# EAGLE board SOT223_UNIVERS4 (EAGLE 6.4)
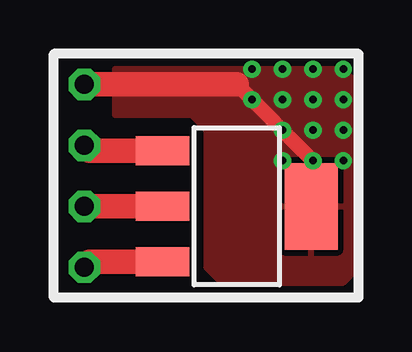
[diagram p0: board, top side]
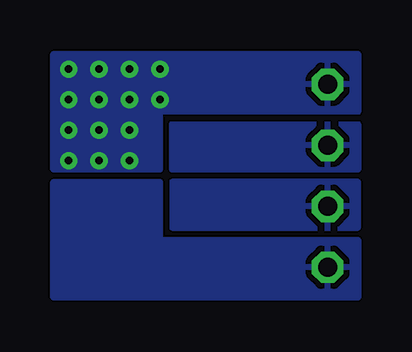
[diagram p1: board, bottom side, seen from below]

No outline drawn. Coordinates in mm, seen from the top.
Copper layers (1*16): Top 0.035mm / dielectric 1.5mm / Bottom 0.035mm
Design rules "default": minimum track width 10mil, minimum drill 0.6mm, track to track 8mil, track to pad 8mil, pad to pad 8mil, via to via 8mil, smd to smd 8mil, copper to edge 40mil, drill to drill 8mil, minimum pad ring 10mil, minimum via ring 8mil, stop-mask expansion 4mil, vias tented up to drill 0mil, thermal gap 10mil
Net classes: 1 pwr: width 0.254 mm

## Footprints (pad centres in the part's own frame; a part is rotated, then mirrored left to right if it is on the bottom)
1 = drill 0.8 octagon: P$1 0,0
SOT223 = smd 1.219 x 2.235: 1 -2.311,-3.099; 2 0,-3.099; 3 2.311,-3.099 | smd 3.6 x 2.2: 4 0,3.099

## Placement (x,y rotation side)
E$58  [1]  1.27,8.89 0 top
E$80  [SOT223]  7.62,3.81 270 top
E$286  [1]  1.27,6.35 0 top
E$287  [1]  1.27,3.81 0 top
E$288  [1]  1.27,1.27 0 top

## Library data of the parts
E$58 E$286-E$288 = drill
E$80 = ref-packages

## Nets
S$87 [pwr]: E$58.P$1 E$80.4
S$122 [pwr]: E$80.1 E$286.P$1
S$123 [pwr]: E$80.2 E$287.P$1
S$124 [pwr]: E$80.3 E$288.P$1

## Tracks (layer width: path | path; a pad name or v marks a point on that pad's centre or on a via)
S$87  (via drill 0.3)
  Top 0.254: 10.79,3.89 E$80.4
  Top 0.61: 7.62,8.89 v10.79,5.71 10.79,3.89
  Top 1.016: E$58.P$1 7.62,8.89
  other vias: 12.06,5.71 9.53,5.71 9.53,6.99 10.79,6.99 12.06,6.99 12.06,8.26 10.79,8.26 9.53,8.26 9.53,9.53 10.79,9.53 12.06,9.53 8.26,8.26 8.26,9.53
  pour Top: 2.54,9.53 2.54,7.62 5.71,7.62 6.35,6.99 6.35,1.27 6.99,0.64 12.06,0.64 12.7,1.27 12.7,8.89 12.06,9.53
  pour Bottom: 0,10.16 0,7.75 8.26,7.75 8.26,5.33 12.7,5.33 12.7,10.16
S$122
  Top 1.016: E$286.P$1 1.5,6.12 E$80.1
  pour Bottom: 0,7.24 0,5.33 7.75,5.33 7.75,7.24
S$123
  Top 1.016: E$287.P$1 E$80.2
  pour Bottom: 0,2.92 0,4.83 7.75,4.83 7.75,2.92
S$124
  Top 1.016: E$288.P$1 1.5,1.5 E$80.3
  pour Bottom: 0,2.41 0,0 12.7,0 12.7,4.83 8.26,4.83 8.26,2.41